# Altium PCB hydrophone preamp.PcbDoc
Units mm, origin at the board's own origin, x right, y up, seen from the top; angles counter-clockwise.
Board outline 40 x 60 mm, 2 copper layers (Top Layer, Bottom Layer); 115 components, 58 nets, 299 pads, 74 vias.
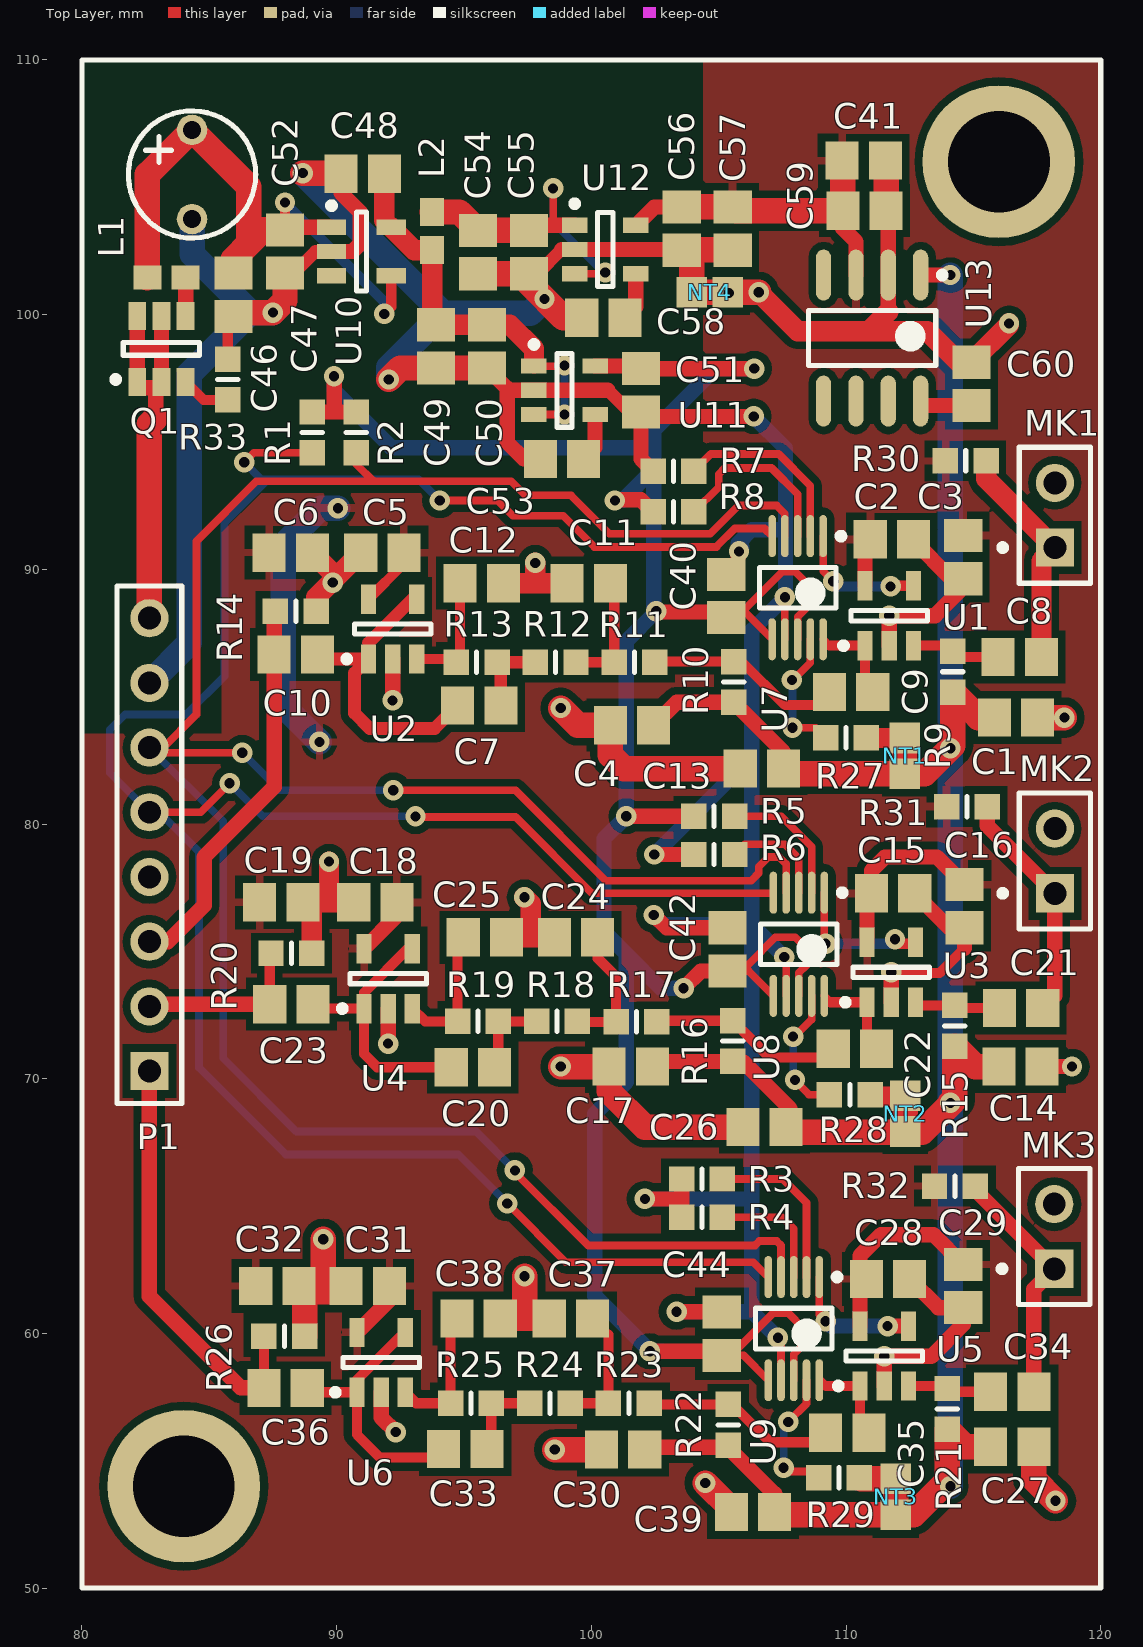
[diagram p0: Top Layer view]
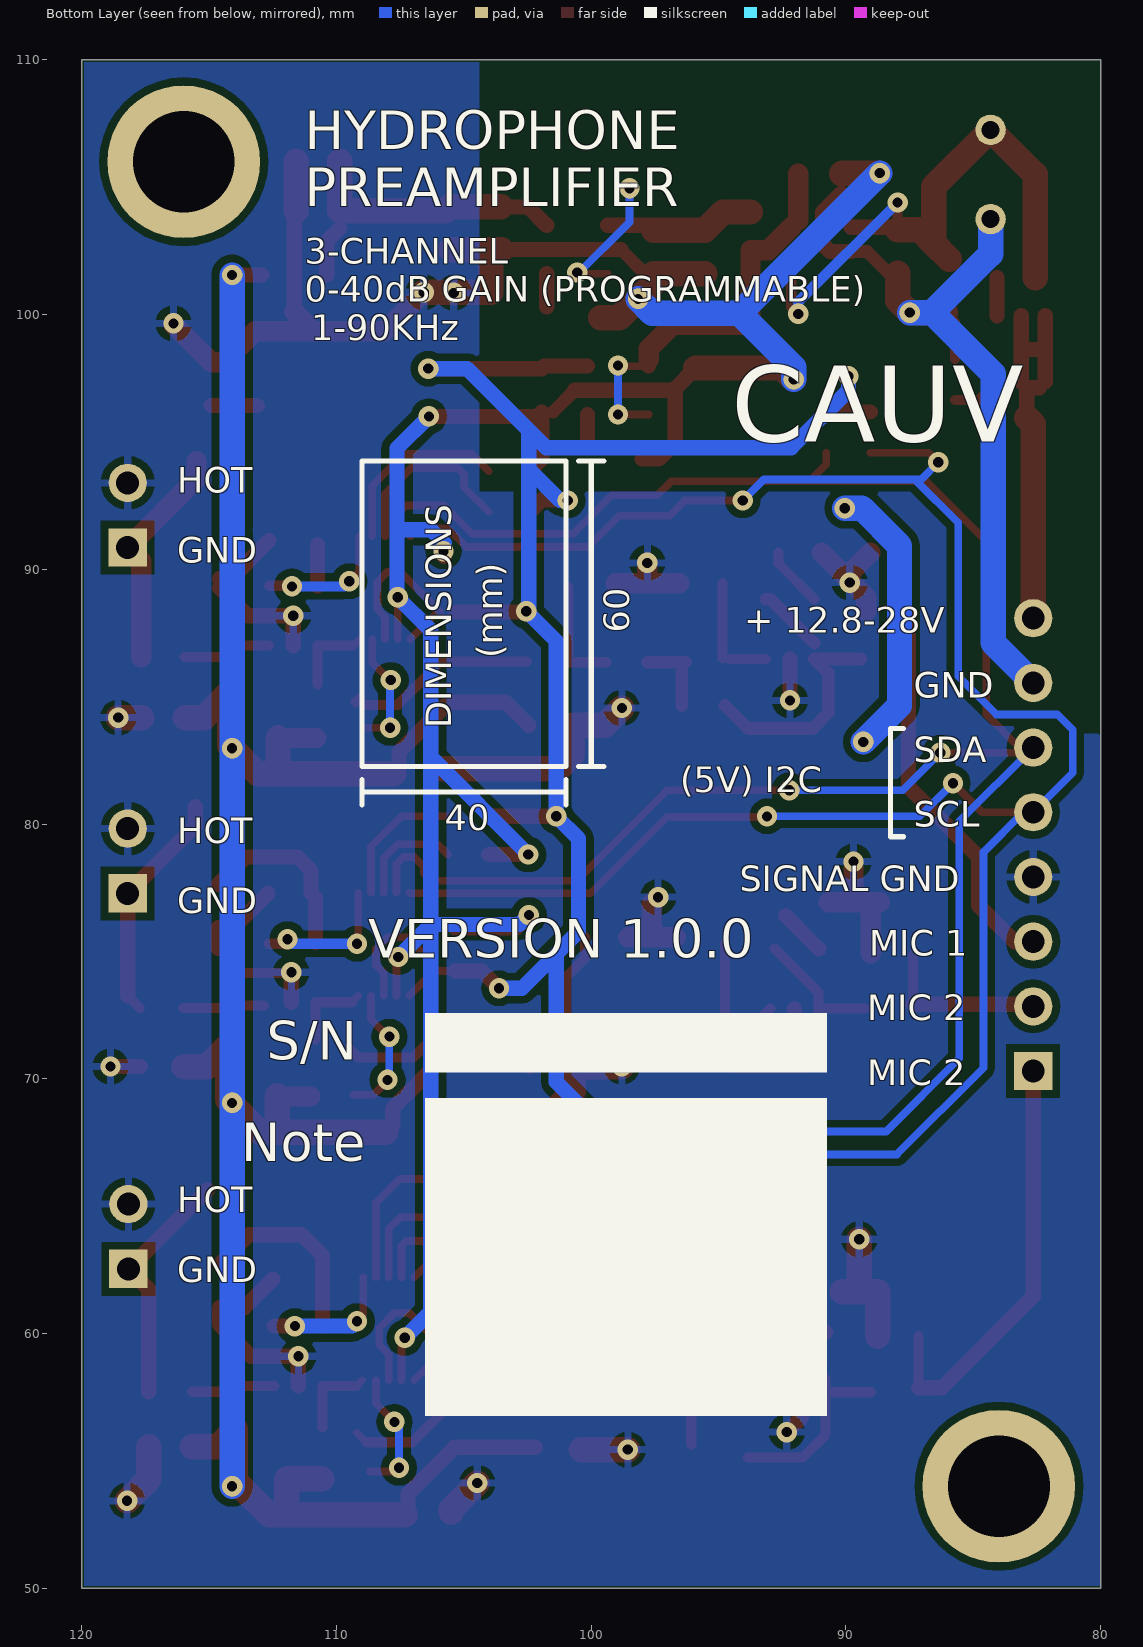
[diagram p1: Bottom Layer view, seen from below]

## Layer stack, top to bottom
Top Layer: signal copper 0.0356
Dielectric: core 0.32, FR-4, Dk 4.8
Bottom Layer: signal copper 0.0356

## Board outline
80,50 80,110 120,110 120,50

## Design rules (kind name [scope] priority, off if disabled: settings)
Clearance AGND [(InNet('AGND') AND IsRegion)] p1: gap=0.3
Clearance +A5 [(InNet('+A5') AND IsRegion)] p2: gap=0.3
Clearance [All] p3: gap=0.2
HoleSize [All] p1: absolutevalues=TRUE maxlimit=10 minlimit=0.2 maxpercent=80.000 minpercent=20.000
HoleToHoleClearance [All] p1: gap=0.15 allowstackedmicrovias=TRUE
MinimumAnnularRing [All] p1: minimumring=0.15
MinimumSolderMaskSliver [All] p1: minsoldermaskwidth=0.15
PlaneClearance [All] p1: clearance=0.5
PlaneConnect [All] p1: planeconnectstyle=Relief reliefexpansion=0.5 reliefentries=4 reliefconductorwidth=0.3 reliefairgap=0.2
PolygonConnect [All] p1: connectstyle=Relief reliefconductorwidth=0.3 reliefentries=4 polygonreliefangle="90 Angle"
RoutingVias [All] p1: holewidth=0.4 width=0.8 viastyle="Through Hole" minholewidth=0.4 minwidth=0.8 maxholewidth=0.4 maxwidth=0.8
SilkToSilkClearance [All] p1: silktosilkclearance=0.2
SilkscreenOverComponentPads [All] p1: minsilkscreentomaskgap=0.2
SolderMaskExpansion [All] p1: expansion=0.125
Width Power [(InNet('+BAT') OR InNet('+5') OR InNet('+A5') OR InNet('+A2.5') OR InNet('AGND') OR InNet('GND'))] p1: maxlimit=4 minlimit=0.15 preferedwidth=2
Width [All] p2: maxlimit=10 minlimit=0.3 preferedwidth=0.3
21 further rules are at their usual default settings.

## Classes and differential pairs
component class schematic: P1 R1 R2 R3 R4 R5 R6 R7 R8
component class U_amplifier1: C1 C2 C3 C4 C5 C6 C7 C8 C9 C10 C11 C12 C13 C21_1 NT1 R9 R10 R11 R12 R13 R14 R15_1 U1 U2
component class U_amplifier2: C14 C15 C16 C17 C18 C19 C20 C21 C22 C23 C24 C25 C26 NT2 R15 R16 R17 R18 R19 R20 U3 U4
component class U_amplifier3: C27 C28 C29 C30 C31 C32 C33 C34 C35 C36 C37 C38 C39 NT3 R21 R22 R23 R24 R25 R26 U5 U6
component class "U_gain controller1": C40 R27 U7
component class "U_gain controller2": C42 R28 U8
component class "U_gain controller3": C44 R29 U9
component class "U_hydrophone input1": MK1 R30
component class "U_hydrophone input2": MK2 R31
component class "U_hydrophone input3": MK3 R32
component class U_power: C41 C46 C47 C48 C49 C50 C51 C52 C53 C54 C55 C56 C57 C58 C59 C60 C61 L1 L2 NT4 Q1 R33 U10 U11 U12 U13
channel class amplifier: U_amplifier1 U_amplifier2 U_amplifier3
channel class "gain controller": "U_gain controller1" "U_gain controller2" "U_gain controller3"
channel class "hydrophone input": "U_hydrophone input1" "U_hydrophone input2" "U_hydrophone input3"
component class "Components Class 1": C18 C19 C20 C23 C24 C25 R17 R18 R19 R20 U4

## Components (designator, comment, footprint, x,y, rotation, side; value= is the part's Value field where it differs from the comment)
C1 "Cap" C0805 116.675,84.177 r180 top (schematic designator C12)
C2 "Cap" C0805 111.8,91.177 r180 top (schematic designator C1)
C3 "Cap" C0805 114.6,90.477 r90 top (schematic designator C2)
C4 "Cap" C0805 101.6,83.877 r0 top (schematic designator C11)
C5 "Cap" C0805 91.8,90.652 r0 top (schematic designator C3)
C6 "Cap" C0805 88.2,90.652 r180 top (schematic designator C4)
C7 "Cap" C0805 95.6,84.652 r180 top (schematic designator C5)
C8 "Cap" C0805 116.825,86.552 r180 top (schematic designator C6)
C9 "Cap" C0805 110.2,85.177 r180 top (schematic designator C7)
C10 "Cap" C0805 88.4,86.652 r180 top (schematic designator C8)
C11 "Cap" C0805 99.9,89.452 r0 top (schematic designator C9)
C12 "Cap" C0805 95.7,89.452 r180 top (schematic designator C10)
C13 "Cap" C0805 106.7,82.177 r0 top
C14 "Cap" C0805 116.85,70.477 r180 top (schematic designator C12)
C15 "Cap" C0805 111.85,77.277 r180 top (schematic designator C1)
C16 "Cap" C0805 114.65,76.777 r90 top (schematic designator C2)
C17 "Cap" C0805 101.55,70.477 r0 top (schematic designator C11)
C18 "Cap" C0805 91.525,76.927 r0 top (schematic designator C3)
C19 "Cap" C0805 87.825,76.927 r180 top (schematic designator C4)
C20 "Cap" C0805 95.35,70.452 r180 top (schematic designator C5)
C21 "Cap" C0805 116.875,72.777 r180 top (schematic designator C6)
C22 "Cap" C0805 110.35,71.177 r180 top (schematic designator C7)
C23 "Cap" C0805 88.225,72.927 r180 top (schematic designator C8)
C24 "Cap" C0805 99.4,75.552 r0 top (schematic designator C9)
C25 "Cap" C0805 95.825,75.552 r180 top (schematic designator C10)
C26 "Cap" C0805 106.8,68.102 r0 top (schematic designator C13)
C27 "Cap" C0805 116.525,55.552 r180 top (schematic designator C12)
C28 "Cap" C0805 111.65,62.137 r180 top (schematic designator C1)
C29 "Cap" C0805 114.6,61.862 r90 top (schematic designator C2)
C30 "Cap" C0805 101.25,55.437 r0 top (schematic designator C11)
C31 "Cap" C0805 91.225,61.862 r0 top (schematic designator C3)
C32 "Cap" C0805 87.675,61.862 r180 top (schematic designator C4)
C33 "Cap" C0805 95.05,55.462 r180 top (schematic designator C5)
C34 "Cap" C0805 116.525,57.712 r180 top (schematic designator C6)
C35 "Cap" C0805 110.05,56.102 r180 top (schematic designator C7)
C36 "Cap" C0805 88,57.862 r180 top (schematic designator C8)
C37 "Cap" C0805 99.2,60.587 r0 top (schematic designator C9)
C38 "Cap" C0805 95.575,60.587 r180 top (schematic designator C10)
C39 "Cap" C0805 106.35,52.987 r0 top (schematic designator C13)
C40 "Cap" C0805 105.3,88.952 r270 top (schematic designator C2)
C41 "Cap" C0805 110.7,106.052 r180 top (schematic designator C16)
C42 "Cap" C0805 105.35,75.077 r270 top (schematic designator C2)
C44 "Cap" C0805 105.125,59.987 r270 top (schematic designator C2)
C46 "Cap" C0805 85.95,100.777 r90 top (schematic designator C1)
C47 "Cap" C0805 87.975,102.477 r90 top (schematic designator C2)
C48 "Cap" C0805 91.025,105.527 r0 top (schematic designator C3)
C49 "Cap" C0805 93.9,98.752 r90 top (schematic designator C4)
C50 "Cap" C0805 95.9,98.752 r90 top (schematic designator C5)
C51 "Cap" C0805 101.95,97.027 r90 top (schematic designator C6)
C52 "Cap Pol1" EEUFM1V221L 84.325,103.75 r90 top (schematic designator C7)
C53 "Cap" C0805 98.85,94.327 r0 top (schematic designator C8)
C54 "Cap" C0805 95.55,102.452 r90 top (schematic designator C9)
C55 "Cap" C0805 97.55,102.452 r90 top (schematic designator C10)
C56 "Cap" C0805 103.55,103.377 r90 top (schematic designator C11)
C57 "Cap" C0805 105.55,103.377 r90 top (schematic designator C12)
C58 "Cap" C0805 100.475,99.877 r0 top (schematic designator C13)
C59 "Cap" C0805 110.725,104.077 r180 top (schematic designator C14)
C60 "Cap" C0805 114.925,97.277 r270 top (schematic designator C15)
L1 "Ferrite Bead" BLM18AG221SN1D 83.325,101.452 r180 top
L2 "Ferrite Bead" BLM18AG221SN1D 93.75,103.277 r90 top
MK1 "Mic1" PIN2 118.2,90.852 r90 top
MK2 "Mic1" PIN2 118.2,77.277 r90 top (schematic designator MK1)
MK3 "Mic1" PIN2 118.175,62.537 r90 top (schematic designator MK1)
NT1 "NET_TIE" NETTIE 112.3,82.177 r90 top net-tie
NT2 "NET_TIE" NETTIE 112.325,68.127 r90 top net-tie (schematic designator NT1)
NT3 "NET_TIE" NETTIE 111.95,53.087 r90 top net-tie (schematic designator NT1)
NT4 "NET_TIE" NETTIE 104.15,100.877 r0 top net-tie (schematic designator NT1)
P1 "Header 8" HDR1X8 82.65,70.3 r90 top
Q1 "PMOSFET_P" FDC608PZ 83.125,98.652 r90 top
R1 "Res2" R0603 89.05,95.375 r90 top
R2 "Res2" R0603 90.775,95.375 r90 top
R3 "Res2" R0603 104.35,66.062 r0 top
R4 "Res2" R0603 104.35,64.562 r0 top
R5 "Res2" R0603 104.825,80.302 r0 top
R6 "Res2" R0603 104.825,78.802 r0 top
R7 "Res2" R0603 103.225,93.852 r0 top
R8 "Res2" R0603 103.225,92.252 r0 top
R9 "Res2" R0603 114.2,85.977 r270 top (schematic designator R1)
R10 "Res2" R0603 105.6,85.577 r270 top (schematic designator R2)
R11 "Res2" R0603 101.7,86.352 r0 top (schematic designator R3)
R12 "Res2" R0603 98.6,86.352 r0 top (schematic designator R4)
R13 "Res2" R0603 95.5,86.352 r0 top (schematic designator R5)
R14 "Res2" R0603 88.4,88.352 r180 top (schematic designator R6)
R15 "Res2" R0603 114.275,72.077 r270 top (schematic designator R1)
R16 "Res2" R0603 105.55,71.477 r270 top (schematic designator R2)
R17 "Res2" R0603 101.775,72.227 r0 top (schematic designator R3)
R18 "Res2" R0603 98.65,72.252 r0 top (schematic designator R4)
R19 "Res2" R0603 95.55,72.252 r0 top (schematic designator R5)
R20 "Res2" R0603 88.225,74.927 r180 top (schematic designator R6)
R21 "Res2" R0603 113.975,57.037 r270 top (schematic designator R1)
R22 "Res2" R0603 105.375,56.412 r270 top (schematic designator R2)
R23 "Res2" R0603 101.475,57.262 r0 top (schematic designator R3)
R24 "Res2" R0603 98.375,57.262 r0 top (schematic designator R4)
R25 "Res2" R0603 95.275,57.262 r0 top (schematic designator R5)
R26 "Res2" R0603 87.95,59.887 r180 top (schematic designator R6)
R27 "Res2" R0603 110,83.377 r180 top (schematic designator R3)
R28 "Res2" R0603 110.15,69.377 r180 top (schematic designator R3)
R29 "Res2" R0603 109.725,54.337 r180 top (schematic designator R3)
R30 "Res2" R0603 114.7,94.252 r180 top (schematic designator R1)
R31 "Res2" R0603 114.75,80.677 r180 top (schematic designator R1)
R32 "Res2" R0603 114.275,65.787 r180 top (schematic designator R1)
R33 "Res2" R0603 85.725,97.452 r270 top (schematic designator R9)
U1 "OPA365" OPA365AIDBVTG4#1 111.7,88.177 r90 top
U2 "OPA365" OPA365AIDBVTG4#1 92.2,87.652 r90 top
U3 "OPA365" OPA365AIDBVTG4#2 111.775,74.177 r90 top (schematic designator U1)
U4 "OPA365" OPA365AIDBVTG4#1 92.025,73.927 r90 top (schematic designator U2)
U5 "OPA365" OPA365AIDBVTG4#1 111.5,59.112 r90 top (schematic designator U1)
U6 "OPA365" OPA365AIDBVTG4#1 91.75,58.862 r90 top (schematic designator U2)
U7 "AD5259" AD5259 108.1,89.277 r270 top (schematic designator U2)
U8 "AD5259" AD5259 108.15,75.277 r270 top (schematic designator U2)
U9 "AD5259" AD5259 107.95,60.187 r270 top (schematic designator U2)
U10 "MCP1804T-C002I/OT" MCP1804T-C002I/OT 90.975,102.477 r0 top (schematic designator U1)
U11 "SPX3819M5-L-5-0" SPX3819M5-L-5-0 98.95,97.027 r0 top (schematic designator U2)
U12 "SPX3819M5-L-5-0" SPX3819M5-L-5-0 100.55,102.552 r0 top (schematic designator U3)
U13 "TLE2426CD" TLE2426CD 111.025,99.077 r270 top (schematic designator U4)

## Footprints (in the part's own frame and the unit in brackets; to place one, negate y for a bottom-side part, rotate by r counter-clockwise, add the part's x,y. Pads: shape width x height; smd on the part's side, far side on the other; paste and mask are expansions set on the pad)
AD5259 [mm]
  oval 1.65x0.3 smd: 1(-2.025,1) 2(-2.025,0.5) 3(-2.025,0) 4(-2.025,-0.5) 5(-2.025,-1) 6(2.025,-1) 7(2.025,-0.5) 8(2.025,0) 9(2.025,0.5) 10(2.025,1)
  silkscreen extent -2.15,-1.5 0.8,1.83, body extent -1.5,-1.5 1.5,1.5, height 1.1
BLM18AG221SN1D [mm] "MURATA - BLM18AG221SN1D - FERRITE BEAD, 0603 CASE, 220OHM"
  rect 1.1x0.95 smd: 1(-0.75,0) 2(0.75,0)
  body extent -0.88,-0.48 0.87,0.48, height 0.95
C0805 [mm] "CAPACITOR 0805"
  rect 1.3x1.5 smd: 1(-0.85,0) 2(0.85,0)
  body extent -1.1,-0.72 1.1,0.72, height 0.87
EEUFM1V221L [mm]
  round 1.2 hole 0.7: 1(0,0) 2(3.5,0)
  silkscreen extent -0.75,-2.5 4.25,2.5
FDC608PZ [mm] "FAIRCHILD SEMICONDUCTOR - FDC608PZ - MOSFET, P, SMD, SSOT-6"
  rect 1.1x0.7 smd: 1(-1.3,0.95) 2(-1.3,0) 3(-1.3,-0.95) 4(1.3,-0.95) 5(1.3,0) 6(1.3,0.95)
  silkscreen extent -1.32,-1.5 0.25,1.92, body extent -0.85,-1.5 0.85,1.5, height 1.1
HDR1X8 [mm] "Connector; Header; 8 Position"
  rect 1.5x1.5 hole 0.9: 1(0,0)
  round 1.5 hole 0.9: 2(2.54,0) 3(5.08,0) 4(7.62,0) 5(10.16,0) 6(12.7,0) 7(15.24,0) 8(17.78,0)
  silkscreen extent -1.27,-1.27 19.05,1.27
MCP1804T-C002I/OT [mm]
  rect 1.15x0.6 smd mask+0.2: 1(-1.175,0.95) 2(-1.175,0) 3(-1.175,-0.95)
  rect 1.15x0.6 smd: 4(1.175,-0.95) 5(1.175,0.95)
  silkscreen extent -1.3,-1.55 0.2,1.92, body extent -0.95,-1.55 0.95,1.55, height 1.45
NETTIE [mm] "Net Tie"
  rect 1.2x1.2 smd: 1(-0.2,0) 2(1.2,0)
  Top Layer lines w1: -0.2,0 1.2,0
OPA365AIDBVTG4#1 [mm]
  rect 1.15x0.6 smd mask+0.2: 1(-1.175,0.95) 2(-1.175,0) 3(-1.175,-0.95)
  rect 1.15x0.6 smd: 4(1.175,-0.95) 5(1.175,0.95)
  silkscreen extent -1.3,-1.5 0.2,1.92, body extent -0.87,-1.52 0.88,1.53, height 1.45
OPA365AIDBVTG4#2 [mm]
  rect 1.15x0.6 smd paste+0.2 mask+0.2: 1(-1.175,0.95) 2(-1.175,0) 3(-1.175,-0.95)
  rect 1.15x0.6 smd: 4(1.175,-0.95) 5(1.175,0.95)
  silkscreen extent -1.3,-1.5 0.2,1.92, body extent -0.87,-1.52 0.88,1.53, height 1.45
PIN2 [mm] "Photosensitive Diode; 2 Leads"
  rect 1.5x1.5 hole 0.9: 1(0,0)
  round 1.5 hole 0.9: 2(2.54,0)
  silkscreen extent -1.4,-1.4 3.94,2.17
R0603 [mm]
  rect 1x1 smd: 1(-0.8,0) 2(0.8,0)
  silkscreen extent 0,-0.4 0,0.4, body extent -0.85,-0.48 0.85,0.47, height 0.45
SPX3819M5-L-5-0 [mm]
  rect 1x0.6 smd mask+0.2: 1(-1.2,0.95) 2(-1.2,0) 3(-1.2,-0.95)
  rect 1x0.6 smd: 4(1.2,-0.95) 5(1.2,0.95)
  silkscreen extent -1.32,-1.45 0.3,1.92, body extent -0.8,-1.45 0.8,1.45, height 1.45
TLE2426CD [mm] "SOP, 8-Leads, Body 5.0x4.0mm (max), Pitch 1.27mm, IPC Medium Density"
  oval 2x0.6 smd: 1(-2.475,1.905) 2(-2.475,0.635) 3(-2.475,-0.635) 4(-2.475,-1.905) 5(2.475,-1.905) 6(2.475,-0.635) 7(2.475,0.635) 8(2.475,1.905)
  silkscreen extent -2.6,-2.5 1.08,2.88, body extent -2,-2.5 2,2.5, height 1.75

## Part data
C1 C2 C3 C4 C5 C6 C7 C8 C9 C10 C11 C12 C13 C14 C15 C16 C17 C18 C19 C20 C21 C22 C23 C24 C25 C26 C27 C28 C29 C30 C31 C32 C33 C34 C35 C36 C37 C38 C39 C40 C41 C42 C44 C46 C47 C48 C49 C50 C51 C53 C54 C55 C56 C57 C58 C59 C60: "Capacitor"
C52: "Polarized Capacitor (Radial)"
L1 L2: library part Inductor, "Inductor"
MK1 MK2 MK3: "Microphone"
P1: "Header, 8-Pin"
Q1: "FAIRCHILD SEMICONDUCTOR - FDC608PZ - MOSFET, P, SMD, SSOT-6"
R1 R2 R3 R4 R5 R6 R7 R8 R9 R10 R11 R12 R13 R14 R15 R16 R17 R18 R19 R20 R21 R22 R23 R24 R25 R26 R27 R28 R29 R30 R31 R32 R33: "Resistor"
U1 U2 U3 U4 U5 U6: "TEXAS INSTRUMENTS - OPA365AIDBVTG4 - OP AMP RAILRAIL, SMD, SOT235, 365"
U7 U8 U9: "IC, DIGIPOT 8BIT I2C EEMEM 50K, SMD"
U10: "MICROCHIP - MCP1804T-C002I/OT - IC, LDO, 12V, 150MA, 5SOT23"
U11 U12: "EXAR - SPX3819M5-L-5-0 - LDO, 500MA, 5V, LOW NOISE, 5SOT23"
U13: "TEXAS INSTRUMENTS - TLE2426CD - VIRTUAL GROUND REFERENCE, SMD, 2426"

## Free pads (board coordinates)
  round 6 hole 4: ""(84,54) ""(116,106)

## Via types
v1: diameter 0.8, hole 0.4, Top Layer to Bottom Layer, tented both sides, 74 vias

## Nets (pads, with @x,y where several pads share a name; then routed paths per layer and width w, separated by ;. In a path a pad name is that pad's centre, name@x,y a point inside that pad or via, vN(x,y) a via of type N, cw(c..) or ccw(c..) an arc to the next point about the centre after c; other vN are vias at no path point)
+5: C40.2 C42.2 C44.2 C51.2 R1.2 R2.2 R5.1 R8.1 U7.6 U7.8 U8.6 U8.8 U9.6 U9.8 U11.5 | length 107.6
  Top Layer w0.3: C44.2 C44.2@105.485,59.137 ; C42.2 106.175,74.227 U8.6 ; C40.2@105.925,88.327 107.5,89.902 108,89.902 108.393,89.509 108.393,88.427 108.1,88.134 U7.8 ; C40.2@106.025,88.327 U7.6 ; 106.175,74.502 107.225,75.552 108,75.552 108.45,75.102 108.45,74.452 108.15,74.152 U8.8 ; U9.6 105.975,59.137 C44.2@105.485,59.137 ; U9.8 107.95,59.177 108.325,59.552 108.325,60.202 107.725,60.802 107.15,60.802 C44.2@105.485,59.137
  Top Layer w0.6: R1.2 89.904,96.175 ; v1(89.9,97.575) 89.904,97.571 89.904,96.175 ; R2.2 89.904,96.175 ; U11.5 C51.2@101.85,97.977 ; v1(100.925,92.702) 100.95,92.727 101.95,92.727 R8.1 ; v1(101.375,80.302) R5.1 ; C51.2 v1(106.4,97.877) ; v1(102.3,59.3) 104.962,59.3 C44.2 ; v1@102.55,88.327 C40.2@105.3,88.327 ; v1(103.625,73.552) 104.3,74.227 C42.2
  Bottom Layer w0.6: v1(89.9,97.575) 89.9,97.025 92.15,94.775 101.775,94.775 102.45,95.45 ; v1(100.925,92.702) 101.225,92.702 102.45,93.927 ; v1(102.3,59.3) 102.79,59.3 102.79,59.302 102.298,59.302 100.138,61.462 100.138,68.638 101.375,69.875 101.375,74.9 ; v1(103.625,73.552) 102.723,73.552 101.375,74.9 ; v1(106.4,97.877) 104.877,97.877 102.45,95.45 ; 101.375,74.9 100.5,75.775 100.5,79.427 v1(101.375,80.302) 101.375,87.177 v1(102.55,88.352) 102.45,88.452 102.45,93.927 ; 102.45,93.927 102.45,95.45
+12: C48.2 C49.2 C50.2 L2.1 U10.5 U11.1 U11.3 | length 16
  Top Layer w0.3: U11.3 v1(98.95,96.077) ; U11.1 98.925,97.977 v1(98.95,98.002)
  Top Layer w0.6: U11.1 U11.1@97.75,98.252
  Top Layer w0.8: U10.5@91.875,103.702 C48.2 ; U10.5 93.05,102.527 L2.1 93.75,99.752 C49.2 C50.2 96.8,99.602 97.75,98.652 U11.1@97.75,98.252
  Bottom Layer w0.3: v1(98.95,96.077) v1(98.95,98.002)
+A2.5: C1.2 C4.2 C13.2 C14.2 C17.2 C26.2 C27.2 C30.2 C39.2 NT1.1 NT2.1 NT3.1 R9.2 R10.2 R15.2 R16.2 R21.2 R22.2 U13.1 | length 102
  Top Layer w0.6: C30.2@102.19,55.527 105.375,55.527 107.2,53.702 C39.2 ; C17.2 102.6,70.677 104.8,70.677 R16.2 105.952,70.677 107.8,68.829 C26.2@107.8,68.177 ; C4.2 103.35,84.777 R10.2 107.55,82.827 C13.2 ; U13.1 v1(114.1,101.552)
  Top Layer w1: C39.2@107.3,52.887 NT3.1 112.66,52.887 113.975,54.202 R21.2 114.66,55.552 C27.2 ; C13.2@107.75,81.977 NT1.1 113.1,81.977 v1(114.1,82.977) ; C26.2@108.075,67.902 112.1,67.902 113,67.902 v1@114.15,69.052 ; v1(114.1,69.052) v1@114.15,69.052 ; v1@114.2,83.077 R9.2 115.2,84.177 C1.2@115.95,84.177 ; C14.2 115.075,70.477 R15.2 114.275,69.177 v1@114.15,69.052
  Bottom Layer w1: v1(114.1,54.002) v1(114.1,69.052) v1(114.1,82.977) 114.1,91.452 ; 114.1,91.652 v1(114.1,101.552)
+A5: C2.2 C3.2 C5.2 C6.2 C15.2 C16.2 C18.2 C19.2 C28.2 C29.2 C31.2 C32.2 C41.2 C56.2 C57.2 C59.2 R30.2 R31.2 R32.2 U1.5 U2.5 U3.5 U4.5 U5.5 U6.5 U12.5 U13.3 | length 45.6
  Top Layer w0.4: U2.5 92.65,90.227 C5.2
  Top Layer w0.6: U6.5 C31.2@92.075,61.312 ; U4.5 C18.2@92.375,76.402 ; U12.5 102.475,104.227 C56.2 ; C59.2@109.875,103.377 110.39,102.862 U13.3 ; U5.5 110.55,63.052 111.375,63.877 113.435,63.877 C29.2 ; U1.5 C2.2@110.75,90.977 ; U3.5 C15.2@110.825,77.102 ; C15.2 111,78.177 111.525,78.702 113.575,78.702 C16.2
  Top Layer w1: C56.2 C57.2 ; C57.2@105.7,104.077 C59.2 C41.2@109.875,106.027
  Bottom Layer w1: v1(89.325,83.225) 87.9,84.65 87.9,90.925 89.375,92.4 v1(90.05,92.4)
+BAT: P1.8 Q1.1 Q1.2 Q1.5 Q1.6 | length 15.7
  Top Layer w0.6: Q1.1 82.175,98.632 ; Q1.6 82.175,98.632 ; Q1.1@82.4,97.127 82.9,97.127 82.9,95.952 ; 83.07,98.632 82.175,98.632 ; Q1.2 Q1.5
  Top Layer w1: P1.8 82.65,95.702 82.9,95.952
AGND: C1.1 C2.1 C3.1 C4.1 C5.1 C6.1 C11.1 C12.1 C13.1 C14.1 C15.1 C16.1 C17.1 C18.1 C19.1 C24.1 C25.1 C26.1 C27.1 C28.1 C29.1 C30.1 C31.1 C32.1 C37.1 C38.1 C39.1 C41.1 C59.1 C60.1 MK1.2 MK2.2 MK3.2 NT4.2 P1.4 R14.1 R20.1 R26.1 U1.2 U2.2 U3.2 U4.2 U5.2 U6.2 U13.2 | length 98.7
  Top Layer w0.4: v1@111.775,74.071 111.781,74.077 111.856,74.152 113.675,74.152 114.65,75.127
  Top Layer w0.6: U6.2 91.75,56.702 v1(92.325,56.127) ; v1(92.025,71.377) 92.077,71.429 92.025,71.481 U4.2 ; v1(92.2,84.852) U2.2 ; C26.1@106.1,68.177 C26.1@106.1,68.477 ; U5.2 v1(111.5,59.102) 113.35,59.102 114.6,60.352 C29.1 113.625,61.012 C28.1 ; 111.66,100.112 U13.2 C59.1@111.66,103.992 ; U1.2 v1(111.7,88.177) 113.5,88.177 C3.1@114.6,89.277 ; U3.2 v1@111.775,74.071 ; v1(111.775,74.177) 111.781,74.171 v1@111.781,74.077 ; C2.1@112.65,91.127 114.15,89.627 C3.1 ; C15.1 114.05,75.927 C16.1 114.65,75.127 ; C14.1 v1(118.875,70.477)
  Top Layer w0.8: C19.1 89.704,76.927 ; R20.1 C19.1@89.025,76.577 ; C6.1 v1@89.95,89.752 ; R14.1 89.2,88.902 C5.1 ; v1(89.704,78.523) 89.704,76.927 ; C18.1 89.704,76.927 ; C12.1 97.8,89.452 ; C25.1 97.63,75.552 ; v1(97.375,77.127) 97.63,76.872 97.63,75.552 ; v1(97.8,90.252) 97.8,89.452 ; C24.1 97.63,75.552 ; C11.1 97.8,89.452 ; v1(106.575,100.877) 108.1,99.352 110.9,99.352 ; 111.66,100.112 110.9,99.352 ; v1(116.4,99.652) 116.4,99.602 C60.1 114.425,98.127 113.2,99.352 110.9,99.352
  Top Layer w1: R26.1 88.75,61.637 89.479,61.637 ; v1(89.479,63.698) 89.479,61.637 ; C31.1@90.15,61.637 89.479,61.637 ; C38.1 97.38,60.587 ; v1(97.38,62.247) 97.38,60.587 ; C37.1 97.38,60.587 ; v1(98.565,55.437) C30.1 ; v1(98.8,70.477) C17.1 100.7,69.502 102.1,68.102 C26.1 ; v1(98.8,84.552) 99.475,83.877 C4.1 100.75,82.702 101.275,82.177 C13.1 C13.1@105.575,82.177 ; v1(104.475,54.127) 105.5,53.102 C39.1 ; NT4.2@105.375,100.852 NT4.2 v1(106.575,100.877) ; C59.1 C41.1@111.575,106.027 ; C27.1 117.375,54.277 v1(118.225,53.427) ; C1.1@117.65,84.177 v1(118.575,84.177)
  other v1: 89.85,89.477 105.4,100.852
GND: C40.1 C42.1 C44.1 C46.1 C47.1 C48.1 C49.1 C50.1 C51.1 C52.1 C53.1 C54.1 C55.1 C56.1 C57.1 C58.1 NT4.1 P1.7 R3.1 R4.1 R6.1 R7.1 R33.1 U7.7 U8.7 U9.7 U10.2 U11.2 U12.2 | length 156.2
  Top Layer w0.3: v1(107.325,59.827) 107.45,59.702 U9.7 ; v1(107.575,74.777) 107.65,74.702 U8.7 ; U7.7 v1@107.6,88.777
  Top Layer w0.4: R33.1 C46.1@85.725,99.702
  Top Layer w0.5: C47.1@88.325,101.627 89.175,102.477 U10.2 ; C55.1@97.886,101.602 98.836,102.552 ; 100.65,97.027 C51.1@101.5,96.177
  Top Layer w0.6: U10.2 90.625,102.477 90.925,102.777 90.925,104.027 C48.1@90.175,104.777 ; C50.1 96.7,97.102 ; C53.1 97.35,94.327 96.7,94.977 96.7,97.102 ; 98.836,102.552 U12.2 C56.1@103.525,102.552 ; 100.65,97.027 U11.2 96.775,97.027 96.7,97.102 ; C51.1 101.95,94.327 R7.1 ; v1(102.103,65.28) 103.503,65.28 ; C51.1@102.125,96.002 v1(106.375,96.002) ; v1(102.45,76.427) 102.95,75.927 C42.1 ; v1(102.475,78.802) R6.1 ; v1(103.35,60.852) 105.11,60.852 C44.1 ; R4.1 R3.1 ; v1@105.775,90.502 105.775,90.685 105.792,90.702 v1(105.8,90.702)
  Top Layer w1: C46.1@86.1,100.077 v1(87.5,100.077) 87.975,100.552 C47.1 ; v1(88.675,105.552) 90.15,105.552 C48.1 ; v1(92.05,97.452) 92.5,97.902 C49.1 C50.1 ; C54.1 C55.1 ; C55.1@97.55,101.227 98.9,99.877 C58.1 ; C56.1@103.525,102.552 103.95,102.552 C57.1@105.525,102.552 ; NT4.1 C56.1@103.95,102.127
  Bottom Layer w0.6: v1(102.103,65.28) 106.3,65.28 ; v1(102.45,76.427) 102.825,76.052 106.3,76.052 ; v1(102.475,78.802) 106.3,82.627 ; v1(103.35,60.852) 106.3,60.852 ; v1(105.8,90.702) 105.92,90.823 105.92,90.882 105.775,91.027 106.3,91.552 107.575,91.552 ; v1(106.375,96.002) 107.625,94.752 107.625,88.927 v1(107.6,88.902) 106.3,87.602 106.3,82.627 ; v1(107.325,59.827) 106.3,60.852 ; v1(107.575,74.777) 106.3,76.052 ; 106.3,60.852 106.3,65.28 ; 106.3,65.28 106.3,76.052 ; 106.3,76.052 106.3,82.627
  Bottom Layer w1: P1.7 84.225,87.115 84.225,93.1 84.225,97.677 86.625,100.077 ; C52.1 84.325,102.377 86.625,100.077 ; v1(87.5,100.077) 86.625,100.077 ; v1(88.675,105.552) 94.175,100.052 ; v1(92.05,97.452) 92.05,97.927 94.175,100.052 ; v1(98.163,100.614) 98.163,100.607 97.608,100.052 94.175,100.052
I2C.SCL: P1.5 R1.1 U7.5 U8.5 U9.5 | length 106.2
  Top Layer w0.3: P1.5 84.66,80.46 v1(85.8,81.6) ; v1(86.375,94.2) 86.75,94.575 R1.1 ; v1(93.1,80.3) 93.124,80.276 97.024,80.276 100.023,77.277 107.125,77.277 U8.5 ; v1(94.05,92.7) 96.325,92.7 96.925,92.1 98.9,92.1 100.123,90.877 104.914,90.877 105.639,91.602 106.8,91.602 U7.5 ; v1(96.7,65.102) 99.002,62.8 106.362,62.8 U9.5
  Bottom Layer w0.3: P1.5 81.1,82.01 81.1,83.7 81.7,84.3 84.1,84.3 85.6,85.8 85.6,91.825 87.3,93.525 ; P1.5@83.04,80.46 84.6,78.9 84.6,70.427 88,67.027 94.775,67.027 v1(96.7,65.102) ; v1(85.8,81.6) 87.1,80.3 v1(93.1,80.3) ; v1(86.375,94.2) 87.05,93.525 87.3,93.525 ; v1(94.05,92.7) 93.225,93.525 87.3,93.525
I2C.SDA: P1.6 R2.1 U7.4 U8.4 U9.4 | length 104.9
  Top Layer w0.3: P1.6@82.85,82.8 v1(86.3,82.8) ; P1.6@83.2,83 84.5,84.3 84.5,91.1 86.85,93.45 91.45,93.45 ; R2.1 90.775,94.125 91.45,93.45 ; 91.475,93.475 91.45,93.45 ; v1(92.227,81.327) 97.025,81.327 100.575,77.777 106.275,77.777 106.575,78.077 106.575,78.327 106.95,78.702 107.375,78.702 107.65,78.427 U8.4 ; v1(97,66.402) 97,66.327 99.875,63.452 106.425,63.452 106.6,63.627 107.275,63.627 107.45,63.452 U9.4 ; U7.4 107.6,92.184 107.282,92.502 105.77,92.502 104.67,91.402 100.7,91.402 99.202,92.9 97.402,92.9 96.852,93.45 91.45,93.45
  Bottom Layer w0.3: P1.6 85.55,80.1 85.55,70.802 88.425,67.927 95.475,67.927 v1(97,66.402) ; v1(86.3,82.8) 87.773,81.327 v1(92.227,81.327)
NetC7_1: C7.1 R12.1 R13.2 | length 3
  Top Layer w0.5: R13.2 R12.1 ; C7.1 R13.2@96.45,86.202
NetC7_2: C7.2 C10.1 U2.1 U2.4 | length 11.5
  Top Layer w0.5: C10.1@89.425,86.477 U2.1 90.7,85.927 90.7,84.352 91.3,83.752 93.85,83.752 C7.2 ; 91.25,87.102 92.975,88.827 U2.4
NetC8_1: C8.1 MK1.1 R30.1 | length 9
  Top Layer w0.8: R30.1 115.5,93.552 MK1.1 117.675,90.327 C8.1
NetC8_2: C8.2 R9.1 U1.3 | length 2.9
  Top Layer w0.4: U1.3 R9.1@113.975,87.002 ; R9.1@114.425,86.552 C8.2
NetC9_1: C9.1 U1.1 U7.10 | length 3.3
  Top Layer w0.3: U7.10 109.35,87.002
  Top Layer w0.4: 109.35,87.002 U1.1 C9.1@110.75,85.477
NetC9_2: C9.2 R10.1 R11.2 | length 7.2
  Top Layer w0.4: R11.2@102.525,86.377 R10.1 105.9,86.377 107.6,84.677 C9.2@108.85,84.677 ; C9.2@109.1,84.927 C9.2@109.25,84.777
NetC10_2: C10.2 P1.3 R14.2 | length 14.6
  Top Layer w0.6: P1.3@83.38,75.38 84.8,76.8 84.8,78.7 87.55,81.45 C10.2 R14.2@87.55,88.302
NetC11_2: C11.2 R11.1 R12.2 | length 4.5
  Top Layer w0.4: R12.2 R11.1 C11.2@100.9,89.302
NetC12_2: C12.2 R13.1 U2.3 | length 4.4
  Top Layer w0.4: U2.3 R13.1@94.575,86.477 ; R13.1@94.85,86.502 C12.2
NetC20_1: C20.1 R18.1 R19.2 | length 3.4
  Top Layer w0.4: C20.1 96.35,70.602 R19.2 R18.1
NetC20_2: C20.2 C23.1 U4.1 U4.4 | length 10.3
  Top Layer w0.4: C23.1@89.25,72.752 U4.1 ; U4.4@92.8,75.102 91.075,73.377 U4.1 ; C20.2 91.6,70.452 91.075,70.977 U4.1
NetC21_1: C21.1 MK2.1 R31.1 | length 9.2
  Top Layer w0.4: C21.1 C21.1@118.2,73.252
  Top Layer w0.6: R31.1 115.55,79.927 MK2.1 C21.1@118.2,73.252
NetC21_2: C21.2 R15.1 U3.3 | length 3.1
  Top Layer w0.4: U3.3@112.85,72.877 R15.1 ; R15.1@114.375,72.777 C21.2
NetC22_1: C22.1 U3.1 U8.10 | length 3.2
  Top Layer w0.3: U8.10 109.4,73.002
  Top Layer w0.4: 109.4,73.002 U3.1 C22.1@110.825,71.552
NetC22_2: C22.2 R16.1 R17.2 | length 7.6
  Top Layer w0.4: R17.2@102.625,72.277 R16.1 107,70.827 109.15,70.827 C22.2
NetC23_2: C23.2 P1.2 R20.2 | length 6.6
  Top Layer w0.4: C23.2 R20.2@87.375,74.877
  Top Layer w0.6: P1.2@82.737,72.927 C23.2
NetC24_2: C24.2 R17.1 R18.2 | length 5.1
  Top Layer w0.4: R18.2@99.475,72.227 R17.1 100.975,74.002 100.25,74.727 C24.2
NetC25_2: C25.2 R19.1 U4.3 | length 5.1
  Top Layer w0.4: U4.3 93.475,72.252 R19.1 C25.2@94.75,75.327
NetC33_1: C33.1 R24.1 R25.2 | length 3.1
  Top Layer w0.4: C33.1@96.075,55.637 R25.2 R24.1
NetC33_2: C33.2 C36.1 U6.1 U6.4 | length 10
  Top Layer w0.4: C36.1@89.025,57.687 U6.1 ; U6.4@92.659,60.037 90.8,58.178 U6.1 ; C33.2@93.865,55.127 91.7,55.127 90.8,56.027 U6.1
NetC34_1: C34.1 MK3.1 R32.1 | length 9.5
  Top Layer w0.6: R32.1@115.075,65.637 MK3.1 117.375,61.737 C34.1
NetC34_2: C34.2 R21.1 U5.3 | length 3
  Top Layer w0.4: U5.3 R21.1@113.875,57.937 ; R21.1@114.1,57.712 C34.2
NetC35_1: C35.1 U5.1 U9.10 | length 3.3
  Top Layer w0.3: U9.10@109,58.162 109.225,57.937
  Top Layer w0.4: 109.225,57.937 U5.1 C35.1@110.55,56.312
NetC35_2: C35.2 R22.1 R23.2 | length 7.6
  Top Layer w0.3: R22.1 R22.1@105.54,57.212 ; C35.2@108.825,55.727 C35.2
  Top Layer w0.4: R23.2@102.325,57.212 R22.1 ; R22.1@105.54,57.212 107.025,55.727 C35.2@108.825,55.727
NetC36_2: C36.2 P1.1 R26.2 | length 16.9
  Top Layer w0.4: C36.2 R26.2
  Top Layer w0.6: P1.1 82.65,61.452 86.24,57.862 C36.2
NetC37_2: C37.2 R23.1 R24.2 | length 4.2
  Top Layer w0.4: R24.2 R23.1 C37.2@100.675,59.962
NetC38_2: C38.2 R25.1 U6.3 | length 5
  Top Layer w0.4: U6.3 93.125,57.262 R25.1 C38.2@94.475,60.337
NetC46_2: C46.2 C47.2 C52.2 L1.2 U10.1 U10.4 | length 24.8
  Top Layer w0.4: C47.2 v1(87.975,104.402) ; v1(91.875,100.027) 92.15,100.302 U10.4
  Top Layer w0.6: C47.2@88.075,103.427 U10.1
  Top Layer w1: L1.2 82.575,105.5 C52.2 86.552,105.023 86.552,102.779 ; C46.2@85.95,102.177 86.552,102.779 ; C47.2 87.75,103.327 87.1,103.327 86.552,102.779
  Bottom Layer w0.4: v1(87.975,104.402) 91.875,100.502 v1(91.875,100.027)
NetC53_2: C53.2 U11.4 | length 1.3
  Top Layer w0.6: C53.2@100.15,94.777 U11.4
NetC54_2: C54.2 C55.2 L2.2 U12.1 U12.3 | length 12.9
  Top Layer w0.3: 98.5,103.502 v1(98.5,104.952) ; U12.3 100.525,101.602 v1@100.55,101.577 ; v1(100.55,101.652) v1@100.55,101.577 ; v1@100.55,101.577 100.55,101.528 v1@100.55,101.577
  Top Layer w0.6: C55.2@97.75,103.502 U12.1
  Top Layer w1: L2.2 94.825,104.027 C54.2 C55.2
  Bottom Layer w0.3: v1(98.5,104.952) 98.5,103.627 v1@100.55,101.577 ; v1(100.55,101.652) v1@100.55,101.577 ; v1@100.55,101.577 100.55,101.528 v1@100.55,101.577
NetC58_2: C58.2 U12.4 | length 1.3
  Top Layer w0.6: C58.2@101.75,100.302 U12.4
NetC60_2: C60.2 U13.8 | length 1.8
  Top Layer w0.6: U13.8@113.105,96.427 C60.2
NetL1_1: L1.1 Q1.4 | length 1.5
  Top Layer w0.6: Q1.4 L1.1
NetNT1_2: NT1.2 R27.1 | length 1.5
  Top Layer w0.8: R27.1 NT1.2
NetNT2_2: NT2.2 R28.1 | length 1.1
  Top Layer w0.8: R28.1@111.025,69.302 NT2.2@112.1,69.302
NetNT3_2: NT3.2 R29.1 | length 1.4
  Top Layer w1: R29.1@110.575,54.287 NT3.2
NetQ1_3: Q1.3 R33.2 | length 1.9
  Top Layer w0.4: Q1.3 84.775,96.652 R33.2
NetR3_2: R3.2 U9.2 | length 6.6
  Top Layer w0.3: R3.2 107.515,66.062 108.45,65.127 U9.2
NetR4_2: R4.2 U9.3 | length 4.9
  Top Layer w0.3: R4.2 107.49,64.562 107.95,64.102 U9.3
NetR5_2: R5.2 U8.2 | length 5.3
  Top Layer w0.3: R5.2 107.45,80.302 108.65,79.102 U8.2
NetR6_2: R6.2 U8.3 | length 4.3
  Top Layer w0.3: R6.2 106.025,79.202 107.6,79.202 108.15,78.652 U8.3
NetR7_2: R7.2 U7.2 | length 7.3
  Top Layer w0.3: R7.2 104.7,94.527 107.35,94.527 108.6,93.277 U7.2
NetR8_2: R8.2 U7.3 | length 7.2
  Top Layer w0.3: R8.2 105,93.227 105,93.727 105.25,93.977 107.075,93.977 108.1,92.952 U7.3
NetR27_2: R27.2 U7.9 | length 4.7
  Top Layer w0.3: v1(107.875,85.652) 107.9,85.677 107.95,85.677 108.6,86.327 U7.9 ; v1(107.9,83.777) R27.2@108.8,83.777
  Bottom Layer w0.3: v1(107.875,85.652) 107.9,85.627 v1(107.9,83.777)
NetR28_2: R28.2 U8.9 | length 5.6
  Top Layer w0.3: v1(107.925,71.652) 107.975,71.652 108.65,72.327 U8.9 ; v1(108,69.952) 108,69.927 108.55,69.377 R28.2
  Bottom Layer w0.3: v1(107.925,71.652) 107.925,70.002 108.15,69.777 v1@108.1,69.777
NetR29_2: R29.2 U9.9 | length 5
  Top Layer w0.3: v1(107.55,54.727) 107.7,54.577 R29.2@108.685,54.577 ; v1(107.73,56.527) 108.45,57.247 U9.9
  Bottom Layer w0.3: v1(107.55,54.727) 107.55,56.347 v1(107.73,56.527)
NetU1_4: U1.4 U7.1 | length 5.2
  Top Layer w0.3: U7.1 109.1,89.927 v1(109.5,89.527)
  Top Layer w0.4: v1(111.75,89.327) 111.725,89.352 U1.4
  Bottom Layer w0.4: v1(109.5,89.527) 109.7,89.327 v1(111.75,89.327)
NetU3_4: U3.4 U8.1 | length 5.7
  Top Layer w0.3: v1@109.15,75.352 U8.1
  Top Layer w0.4: v1@109.15,75.352 v1(109.2,75.302) ; v1(111.925,75.477) 112.1,75.302 U3.4@112.675,75.302
  Bottom Layer w0.4: v1(109.2,75.302) 111.9,75.302 111.925,75.327 v1(111.925,75.477)
NetU5_4: U5.4 U9.1 | length 5.2
  Top Layer w0.3: U9.1 108.95,60.727 v1(109.2,60.477)
  Top Layer w0.6: v1(111.635,60.287) U5.4
  Bottom Layer w0.6: v1(109.2,60.477) 109.39,60.287 v1(111.635,60.287)
pads on no net: U10.3 U13.4 U13.5 U13.6 U13.7

## Polygon pours and split planes (outlines as drawn)
AGND on Bottom Layer "AGND" (solid, remove dead copper, pour order 1000): 104.4,109.9 104.4,93.052 86.2,93.052 82.9,84.252 82.9,83.552 80,83.552 80,50.1 119.9,50.1 119.9,109.9
+A5 on Top Layer "AA5" (solid, remove dead copper, pour order 1001): 104.4,109.9 104.4,93.052 85.5,93.052 85.5,83.552 80,83.552 80,50.1 119.9,50.1 119.9,109.9

## Silkscreen, mask and mechanical layers (free items; w line width, h text height)
Top Overlay:
  the board outline again, w0.2
Bottom Overlay:
  rectangle: 90.75,70.25 106.525,72.575
  rectangle: 90.75,56.75 106.525,69.25
  lines w0.2: 87.75,79.5 88.25,79.5 88.25,83.75 87.75,83.75 ; 99.5,82.25 99.75,82.25 100.5,82.25 ; 99.5,94.25 100,94.25 ; 100,82.25 100,94.25 ; 100.5,94.25 100,94.25 ; 101,80.75 101,81.75 ; 101,81.25 109,81.25 ; 109,80.75 109,81.25 ; 109,81.75 109,81.25 ; 101,82.25 109,82.25 109,94.25 101,94.25 101,82.25
  text "HYDROPHONE" at 111.25,106.5 h1.5
  text "PREAMPLIFIER" at 111.25,104.25 h1.5
  text "3-CHANNEL" at 111.25,102 h1
  text "0-40dB GAIN (PROGRAMMABLE)" at 111.25,100.5 h1
  text "1-90KHz" at 111,99 h1
  text "CAUV" at 94.5,95 h3
  text "HOT" at 116.25,93 h1
  text "GND" at 116.25,90.25 h1
  text "+ 12.8-28V" at 94,87.5 h1
  text "60" at 98.5,87.5 h1 r270
  text "(mm)" at 103.5,86.5 h1 r270
  text "GND" at 87.336,84.964 h1
  text "DIMENSIONS" at 105.5,83.75 h1 r270
  text "SDA" at 87.336,82.429 h1
  text "(5V) I2C" at 96.5,81.25 h1
  text "SCL" at 87.336,79.893 h1
  text "40" at 105.75,79.75 h1
  text "HOT" at 116.25,79.25 h1
  text "SIGNAL GND" at 94.167,77.357 h1
  text "GND" at 116.25,76.5 h1
  text "MIC 1" at 89.085,74.821 h1
  text "VERSION 1.0.0" at 108.75,74.75 h1.5
  text "MIC 2" at 89.169,72.286 h1
  text "S/N" at 112.75,70.75 h1.5
  text "MIC 2" at 89.169,69.75 h1
  text "Note" at 113.75,66.75 h1.5
  text "HOT" at 116.25,64.75 h1
  text "GND" at 116.25,62 h1